# Altium PCB PCB1.PcbDoc
Units mil, origin at the board's own origin, x right, y up, seen from the top; angles counter-clockwise.
Board outline 3905.03 x 3980.03 mil, 2 copper layers (Top Layer, Bottom Layer); 44 components, 53 nets, 189 pads, 19 vias.
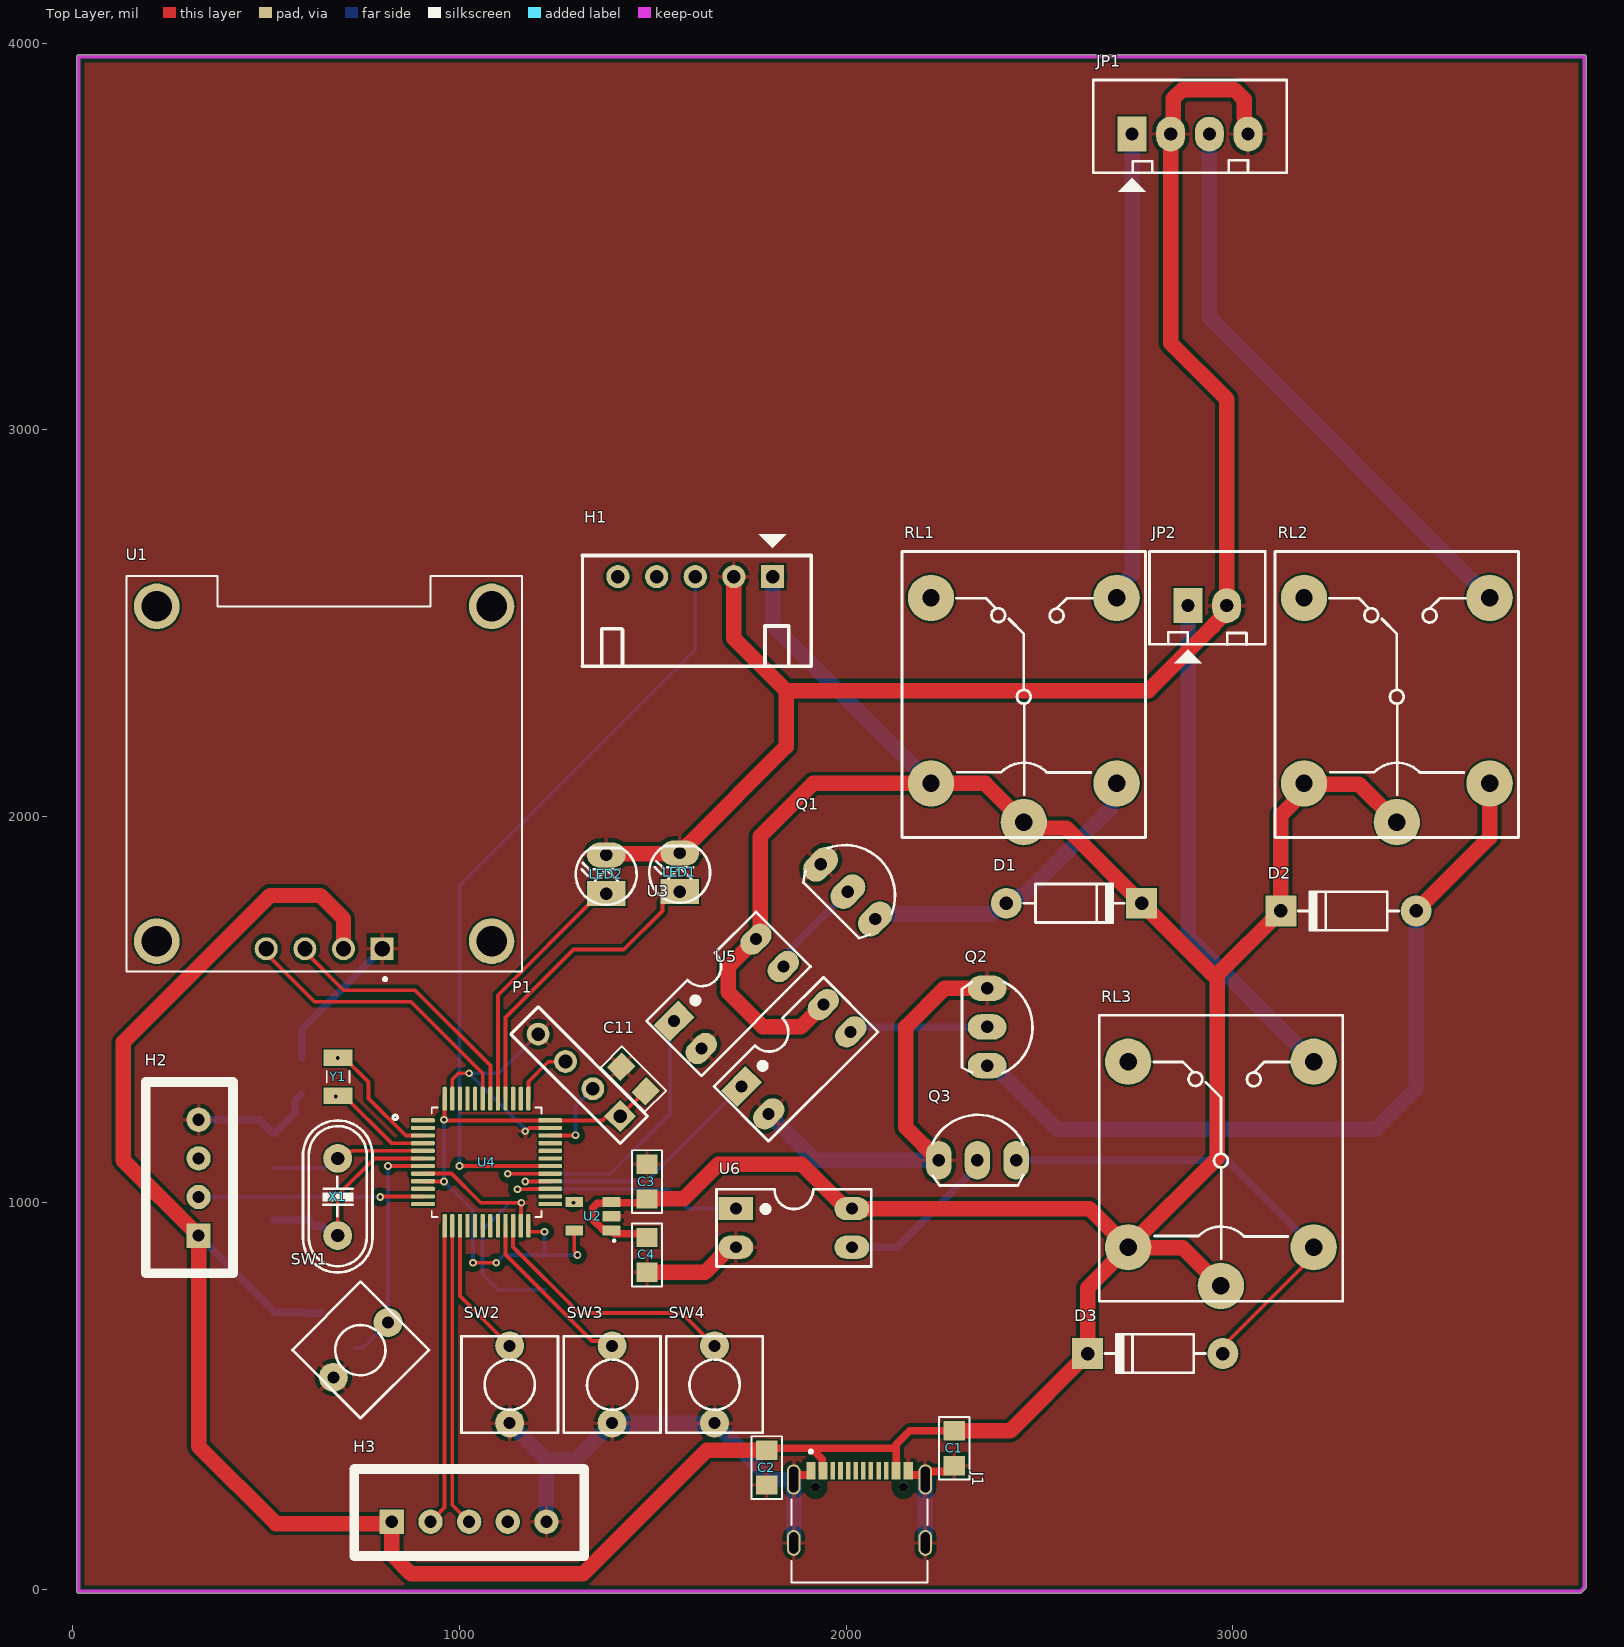
[diagram p0: Top Layer view]
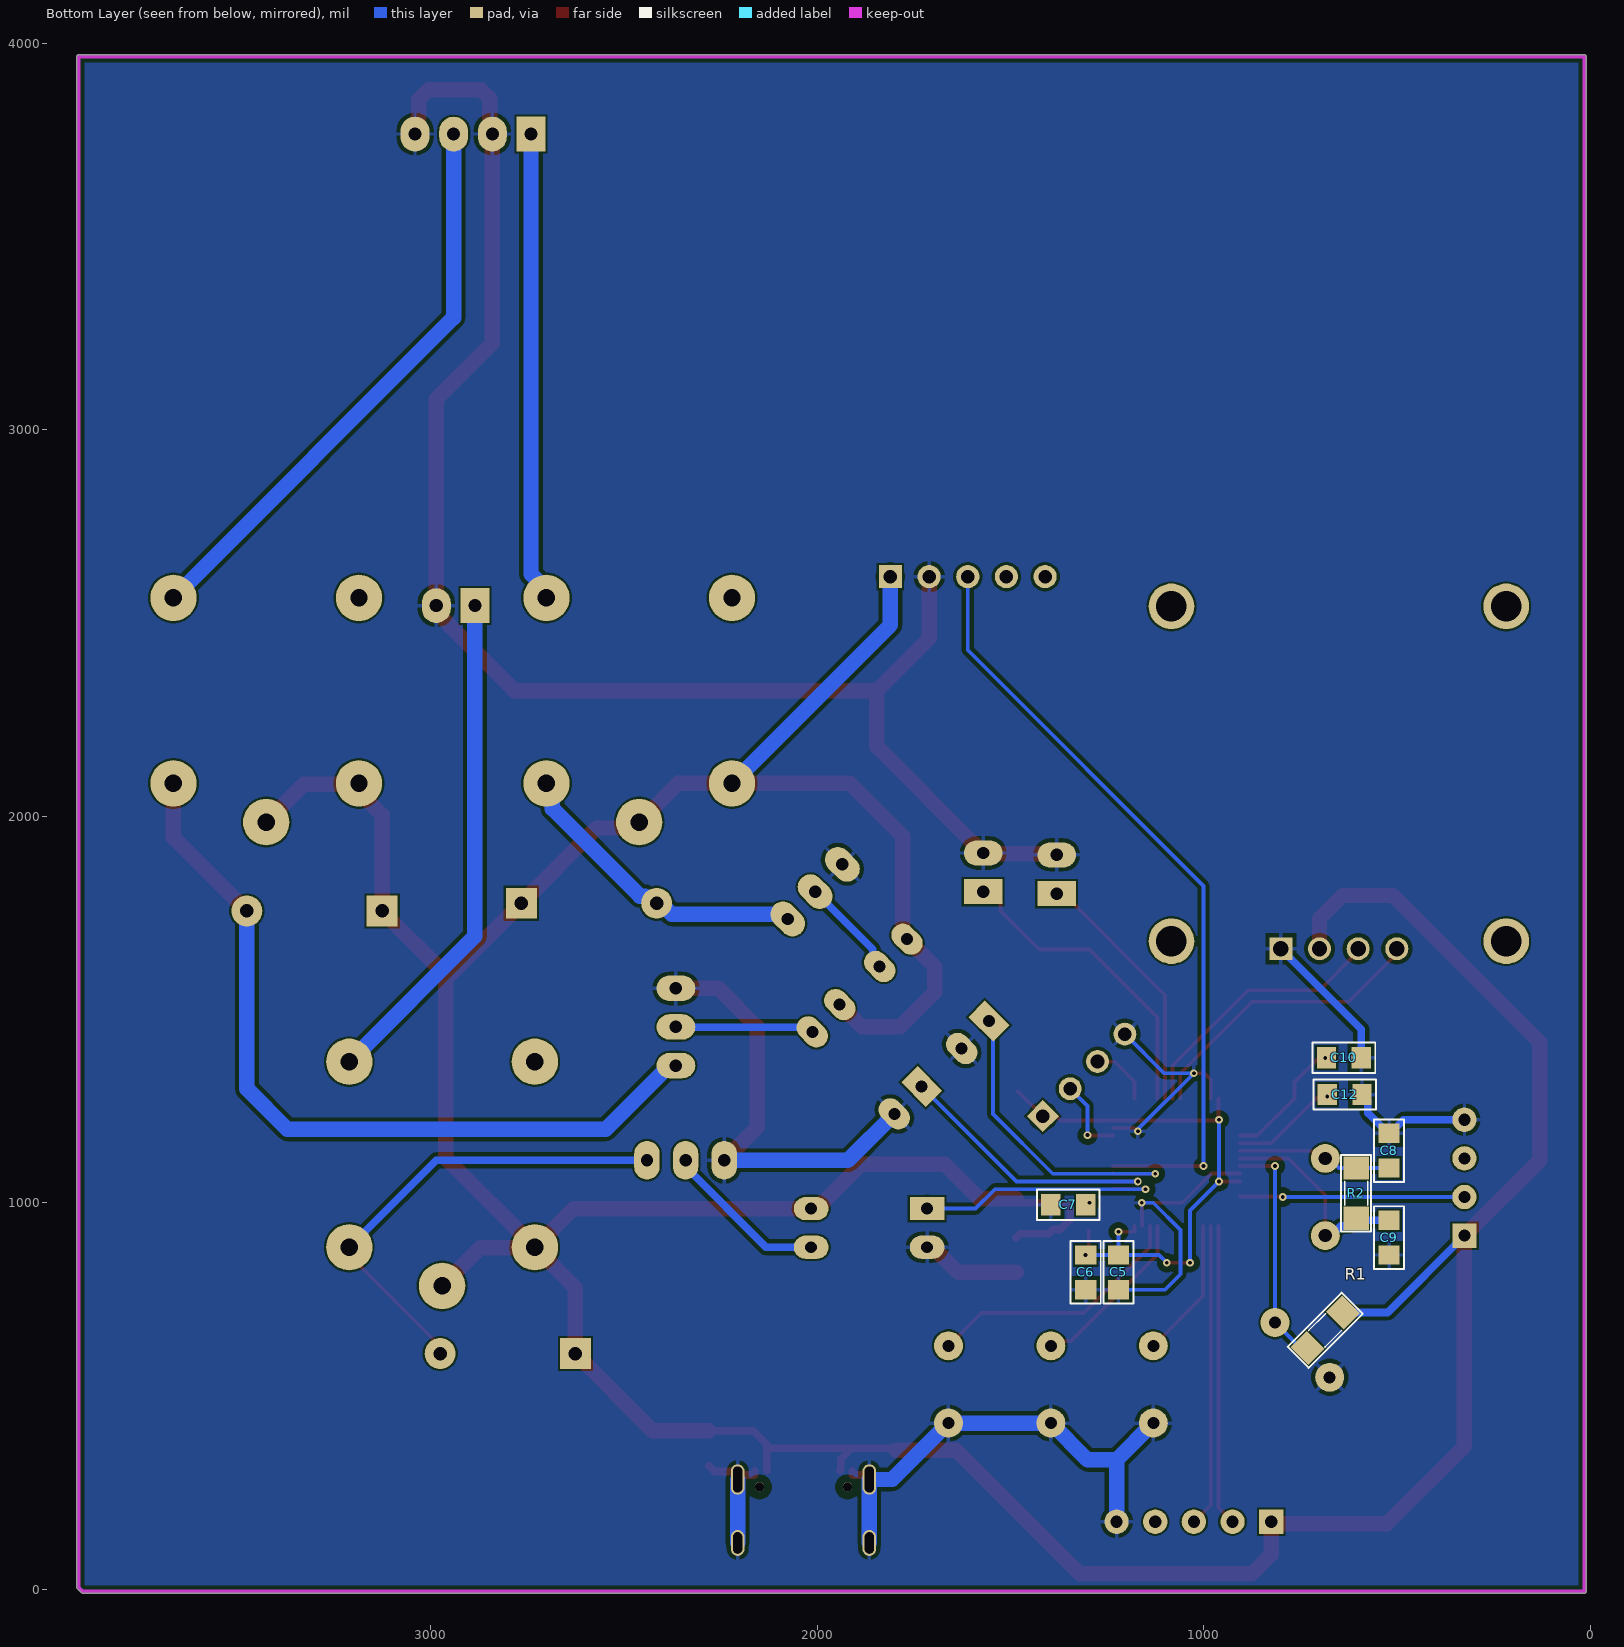
[diagram p1: Bottom Layer view, seen from below]
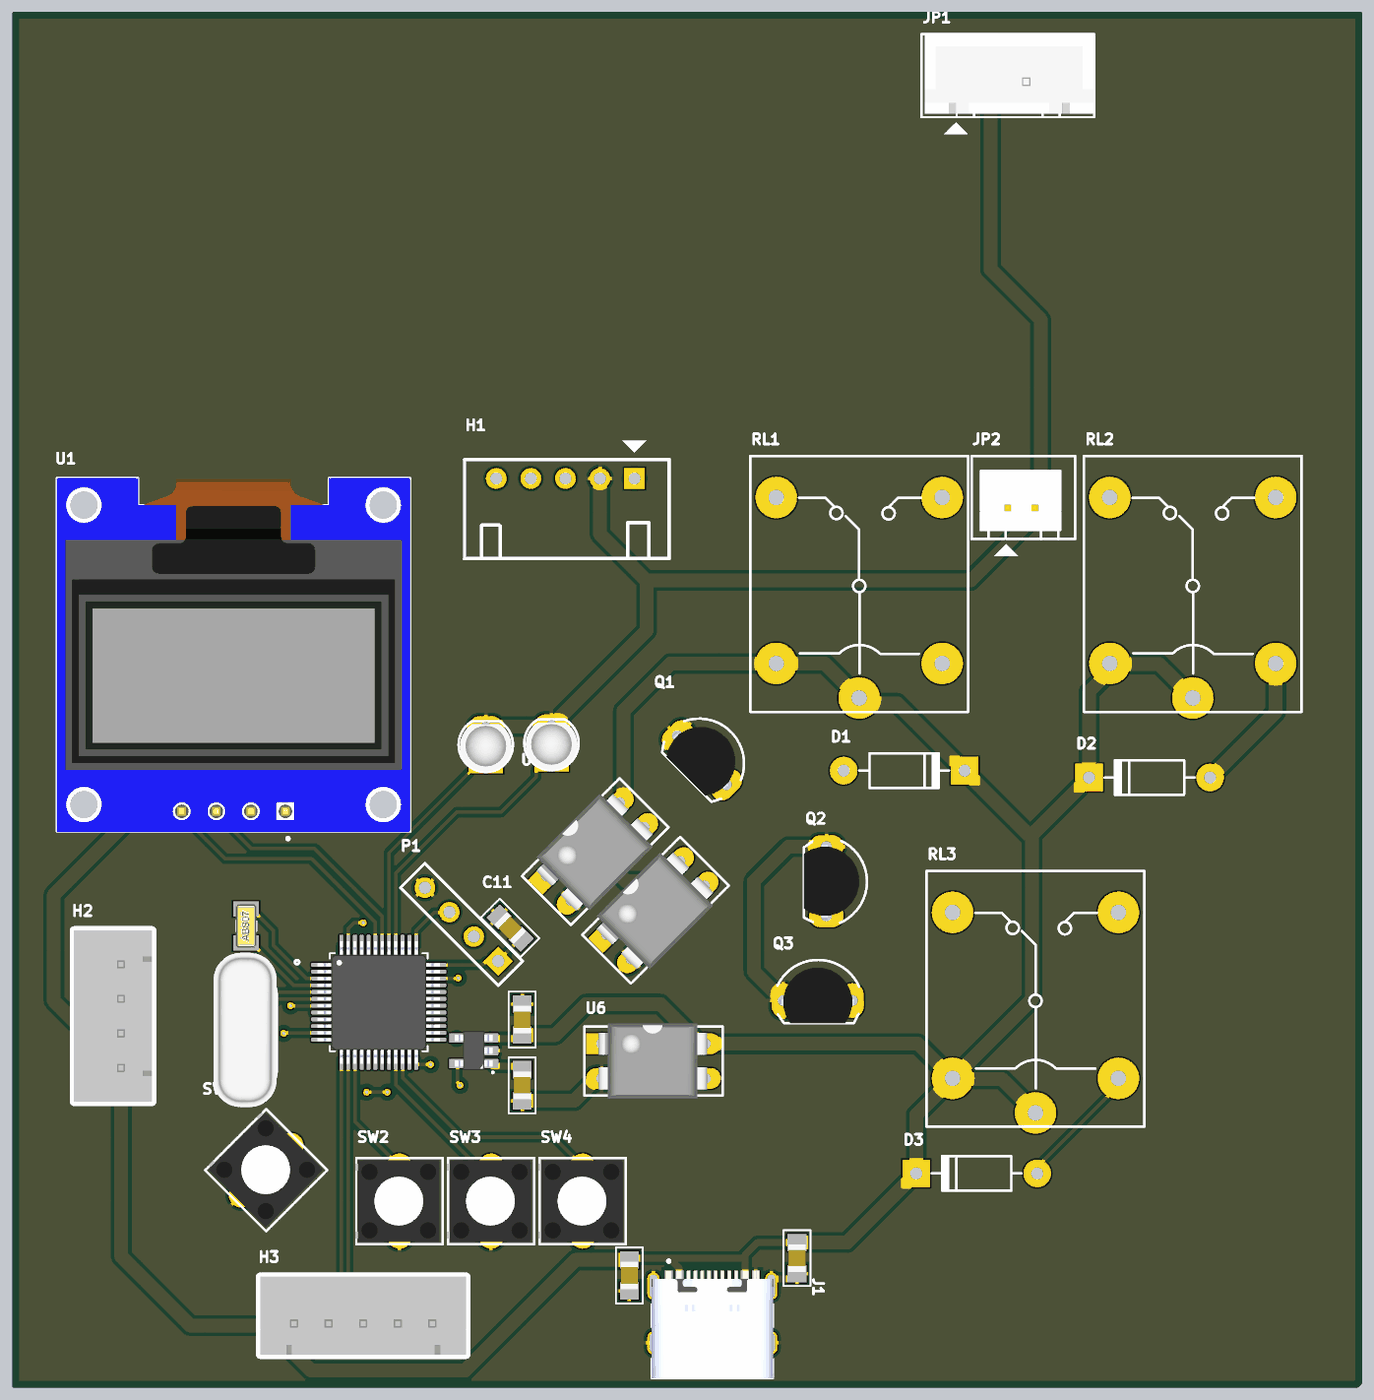
[diagram p2: 3D render of the assembled board from above, using the file's embedded part models]
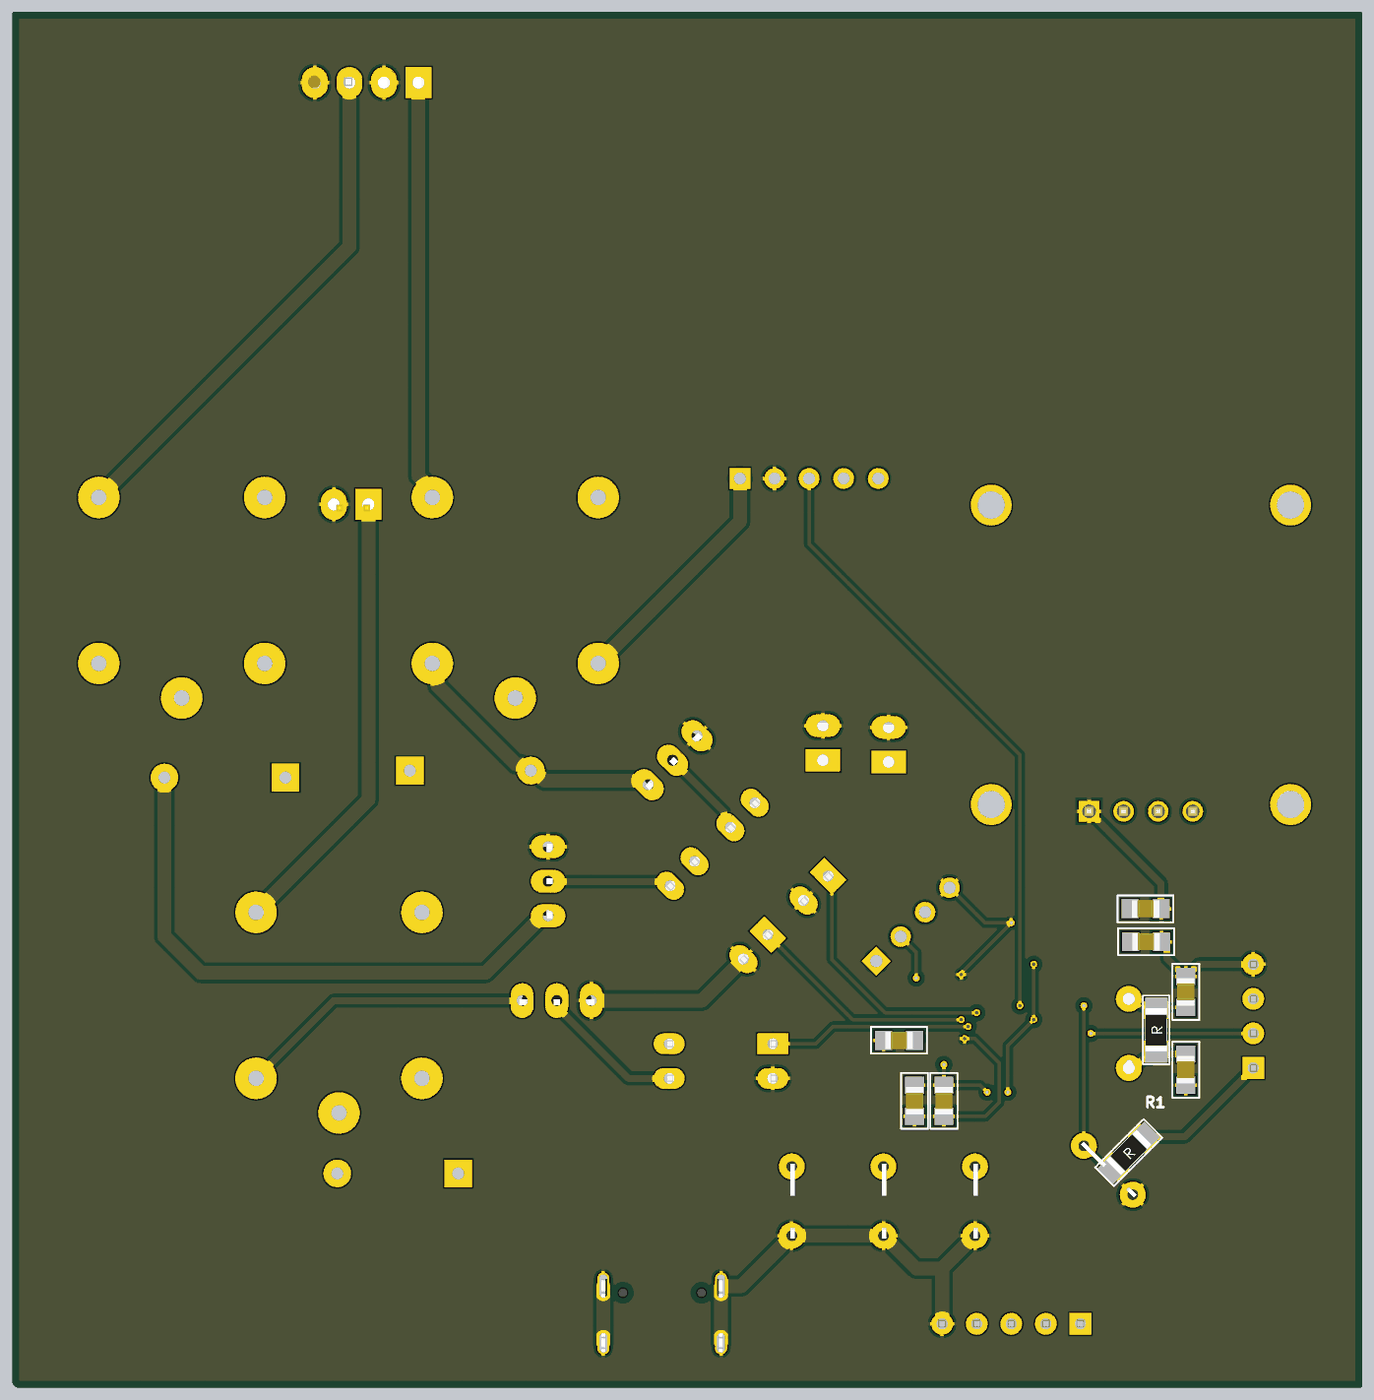
[diagram p3: 3D render of the assembled board from below, using the file's embedded part models]

## Layer stack, top to bottom
Top Solder: solder mask 0.4, Solder Resist, Dk 3.5
Top Layer: signal copper 1.4
Dielectric 1: dielectric 12.6, FR-4, Dk 4.8
Bottom Layer: signal copper 1.4
Bottom Solder: solder mask 0.4, Solder Resist, Dk 3.5

## Board outline
9.98,-4.95 9.98,3965 cw(c15,3965) 15,3970.01 3910,3970.02 cw(c3910,3965) 3915.02,3965 3915.02,5 3913.55,1.45 3903.55,-8.55 3900,-10.01 15,-10.02 cw(c15,-5)

## Design rules (kind name [scope] priority, off if disabled: settings)
Clearance [All] p1: gap=5 ignorepadtopadclearanceinfootprint=FALSE except(10: Arc-Fill Arc-Poly Arc-Region Track-Fill Track-Poly Track-Region; 20: Fill-Hole Poly-Hole Region-Hole)
ComponentClearance [All] p1: gap=10 collisioncheckmode=3 verticalgap=0 showdistances=FALSE
PolygonConnect [All] p1: connectstyle=Relief reliefconductorwidth=10 reliefentries=4 polygonreliefangle="90 Angle" airgapwidth=10
RoutingVias [All] p1: holewidth=15 width=30 viastyle="Through Hole" minholewidth=10 minwidth=20 maxholewidth=28 maxwidth=50
SolderMaskExpansion [All] p1: expansion=4 istentingtop=FALSE
Width [All] p1: maxlimit=40 minlimit=10 preferedwidth=20 minimp=50.000000 maximp=50.000000 favimp=50.000000
29 further rules are at their usual default settings.

## Components (designator, comment, footprint, x,y, rotation, side; value= is the part's Value field where it differs from the comment)
C1 "0805" C-0805 2280,365 r90 top value=103
C2 "0805" C-0805 1795,315 r90 top value=103
C3 "103" C-0805 1485,1055 r270 top
C4 "103" C-0805 1485,865 r90 top
C5 "103" C-0805 1220,820 r90 bottom
C6 "103" C-0805 1305,820 r90 bottom
C7 "103" C-0805 1350,995 r180 bottom
C8 "103" C-0805 520,1135 r270 bottom
C9 "103" C-0805 520,910 r90 bottom
C10 "103" C-0805 636.72,1375.36 r0 bottom
C11 "103" C-0805 1450,1320 r315 top
C12 "103" C-0805 635,1280 r0 bottom
D1 "1N4007" D1A 2415,1775 r180 top
D2 "1N4007" D1A 3475,1755 r0 top
D3 "1N4007" D1A 2975,610 r0 top
H1 "HLK LD2410c" "Header 5P DC 2.54" 1810,2620 r270 top
H2 "DHT22" XH2.54M-4 325,915 r90 top
H3 "HY SRF05" XH2.54M-5 825,175 r0 top
J1 "TYPE-C-31-M-12" HRO_TYPE-C-31-M-12 2035,120 r0 top
JP1 "PHUN SUONG" CON4 2740,3765 r0 top value="Connector 4"
JP2 "QUAT" CON2 2885,2545 r0 top value="Connector 2"
LED1 "LED MODE" LED-3 1570,1805 r90 top value="LED 3 ly Single Colour"
LED2 "LED STATE" LED-3 1380,1800 r90 top value="LED 3 ly Single Colour"
P1 "Header 4" HDR1X4 1415.71,1224.29 r135 top
Q1 "NPN_EBC" QTO-92 2005,1805 r315 top
Q2 "NPN_EBC" QTO-92 2365,1455 r270 top
Q3 "NPN_EBC" QTO-92 2340,1110 r0 top
R1 "1k" SM-1206 685,670 r135 bottom value="R1/4W - 1K"
R2 "1k" SM-1206 605,1025 r90 bottom value="R1/4W - 1K"
RL1 "Relay 10A/12V" RL_SPDT_10A 2460,1985 r90 top value="Relay SPDT, 10A, 12V"
RL2 "Relay 10A/12V" RL_SPDT_10A 3425,1985 r90 top value="Relay SPDT, 10A, 12V"
RL3 "Relay 10A/12V" RL_SPDT_10A 2970,785 r90 top value="Relay SPDT, 10A, 12V"
SW1 "SW" SW2 673.58,548.58 r45 top value="SW chip 2 pin"
SW2 "SW" SW2 1130,430 r90 top value="SW chip 2 pin"
SW3 "SW" SW2 1395,430 r90 top value="SW chip 2 pin"
SW4 "SW" SW2 1660,430 r90 top value="SW chip 2 pin"
U1 "DM-OLED096-636" MODULE_DM-OLED096-636 650,2110 r180 top
U2 "RT9193-33GB" SOT94P279X129-5N 1345,965 r180 top
U3 "PC817" DIP4/W0.3 1555,1470 r315 top
U4 "STM32F103C8T6" QFP50P900X900X160-48N 1070,1105 r0 top
U5 "PC817" DIP4/W0.3 1729.29,1300.71 r315 top
U6 "PC817" DIP4/W0.3 1715,985 r270 top
X1 "4Mhz" XT2 685,1015 r270 top
Y1 "ABS07-32.768KHZ-T" XTAL_ABS07-32.768KHZ-T 686.21,1325.86 r90 top

## Footprints (in the part's own frame and the unit in brackets; to place one, negate y for a bottom-side part, rotate by r counter-clockwise, add the part's x,y. Pads: shape width x height; smd on the part's side, far side on the other; paste and mask are expansions set on the pad)
C-0805 [mil] "Compoment SMD 80x50mil"
  rect 50x55 smd: 1(-45,0) 2(45,0)
  silkscreen extent -81,-39 81,39, body extent -40,-25 40,25, height 24
CON2 [mil] "CON2"
  rect 75x90 hole 34: 1(0,0)
  oval 75x90 hole 34: 2(100,0)
  silkscreen extent -100,-150 200,140, body extent -76,-77 160,100, height 236
CON4 [mil] "CON4"
  rect 75x90 hole 34: 1(0,0)
  oval 75x90 hole 34: 2(100,0) 3(200,0) 4(300,0)
  silkscreen extent -100,-150 400,140, body extent -90,-90 398,136, height 276
D1A [mil] "Diode 1A, W 100mil, L 350mil"
  round 80 hole 35: 1(0,0)
  rect 80x80 hole 35: 2(-350,0)
  silkscreen extent -305,-50 -45,50, body extent -366,-42 16,41, height 100
DIP4/W0.3 [mil] "4 PIN, W 300mil, Pin to pin 100mil"
  rect 60x90 hole 31: 1(0,0)
  oval 60x90 hole 31: 2(100,0) 3(100,300) 4(0,300)
  silkscreen extent -50,-50 150,350, body extent -59,-10 159,305, height 170
HDR1X4 [mm] "Connector; Header; 4 Position"
  rect 1.5x1.5 hole 0.9: 1(0,0)
  round 1.5 hole 0.9: 2(2.54,0) 3(5.08,0) 4(7.62,0)
  silkscreen extent -1.27,-1.27 8.89,1.27, body extent -1.27,-1.27 8.89,1.27, height 7
"Header 5P DC 2.54" [mil]
  rect 60x60 hole 35: 1(0,0)
  round 60 hole 35: 2(0,-100) 3(0,-200) 4(0,-300) 5(0,-400)
  silkscreen extent -110,-492 232,100
HRO_TYPE-C-31-M-12 [mm]
  rect 0.6x1.14 smd mask+0.05: A1_B12(-3.2,4.75) A4_B9(-2.4,4.75) B1_A12(3.2,4.75) B4_A9(2.4,4.75)
  rect 0.3x1.14 smd mask+0.05: A5(-1.25,4.75) A6(-0.25,4.75) A7(0.25,4.75) A8(1.25,4.75) B5(1.75,4.75) B6(0.75,4.75) B7(-0.75,4.75) B8(-1.75,4.75)
  oval 0.9x2 hole 0.6 slot 1.7 at 90 deg: S1(-4.325,4.17) S2(4.325,4.17)
  oval 0.9x1.7 hole 0.6 slot 1.4 at 90 deg: S3(-4.325,0) S4(4.325,0)
  round 0.6 hole 0.6 unplated: ""(-2.89,3.68) ""(2.89,3.68)
  silkscreen extent -4.47,-2.6 4.47,6.1, body extent -4.47,-2.6 4.47,5.3, height 3.31
LED-3 [mil] "LED 2 PIN, 3ly Only colour"
  rect 65x100 hole 32: 1(0,0)
  oval 65x100 hole 32: 2(100,0)
  silkscreen extent -29,-78 118,79, body extent -29,-75 109,75, height 256
MODULE_DM-OLED096-636 [mm]
  rect 1.508x1.508 / inner round 1.508 / far side rect 1.508x1.508 hole 1: 1(-3.81,11.5)
  round 1.508 hole 1: 2(-1.27,11.5) 3(1.27,11.5) 4(3.81,11.5)
  round 3 hole 2: S1(-11,11) S2(11,11) S3(11,-11) S4(-11,-11)
  silkscreen extent -13,-13 13,13.6, body extent -13,-13 13,13, height 5.66
QFP50P900X900X160-48N [mm]
  rrect50% 1.56x0.28 smd: 1(-4.18,2.75) 2(-4.18,2.25) 3(-4.18,1.75) 4(-4.18,1.25) 5(-4.18,0.75) 6(-4.18,0.25) 7(-4.18,-0.25) 8(-4.18,-0.75) 9(-4.18,-1.25) 10(-4.18,-1.75) 11(-4.18,-2.25) 12(-4.18,-2.75) 25(4.18,-2.75) 26(4.18,-2.25) 27(4.18,-1.75) 28(4.18,-1.25) 29(4.18,-0.75) 30(4.18,-0.25) 31(4.18,0.25) 32(4.18,0.75) 33(4.18,1.25) 34(4.18,1.75) 35(4.18,2.25) 36(4.18,2.75)
  rrect50% 0.28x1.56 smd: 13(-2.75,-4.18) 14(-2.25,-4.18) 15(-1.75,-4.18) 16(-1.25,-4.18) 17(-0.75,-4.18) 18(-0.25,-4.18) 19(0.25,-4.18) 20(0.75,-4.18) 21(1.25,-4.18) 22(1.75,-4.18) 23(2.25,-4.18) 24(2.75,-4.18) 37(2.75,4.18) 38(2.25,4.18) 39(1.75,4.18) 40(1.25,4.18) 41(0.75,4.18) 42(0.25,4.18) 43(-0.25,4.18) 44(-0.75,4.18) 45(-1.25,4.18) 46(-1.75,4.18) 47(-2.25,4.18) 48(-2.75,4.18)
  silkscreen extent -6.15,-3.6 3.6,3.6, body extent -4.5,-4.5 4.5,4.5, height 1.6
QTO-92 [mil] "TO-92"
  oval 66x100 hole 32: 1(-100,0) 2(0,0) 3(100,0)
  silkscreen extent -117,-65 120,118, body extent -109,-66 109,95, height 385
RL_SPDT_10A [mil] "Relay SPDT, 5 pin, 10A,W 650mil, L 800mil, H 800mil"
  round 120 hole 45: 1(0,0) 2(580,240) 3(580,-240) 4(100,-240) 5(100,240)
  silkscreen extent -40,-315 700,315
SM-1206 [mil] "Compoment SMD 120x60mil"
  rect 60x65 smd: 1(-65,0) 2(65,0)
  silkscreen extent -99,-38 99,39, body extent -83,-35 83,36, height 25
SOT94P279X129-5N [mm]
  rrect12% 1.17x0.67 smd: 1(-1.22,0.94) 2(-1.22,0) 3(-1.22,-0.94) 4(1.22,-0.94) 5(1.22,0.94)
  silkscreen extent -1.47,1.53 -1.33,1.67, body extent -1.4,-1.45 1.4,1.45, height 1.3
SW2 [mil] "SW button 2pin, 250x 250 mil"
  round 75 hole 31: 1(0,0) 2(200,0)
  silkscreen extent -25,-125 225,125, body extent -18,-116 218,128, height 197
XH2.54M-4 [mm]
  rect 1.6x1.6 hole 0.8: 1(0,0)
  round 1.6 hole 0.8: 2(2.54,0) 3(5.08,0) 4(7.62,0)
  silkscreen extent -2.48,-2.26 10.1,3.46, body extent -2.48,-2.26 10.1,3.48, height 6.91
XH2.54M-5 [mm]
  rect 1.6x1.6 hole 0.8: 1(0,0)
  round 1.6 hole 0.8: 2(2.54,0) 3(5.08,0) 4(7.62,0) 5(10.16,0)
  silkscreen extent -2.48,-2.26 12.64,3.46, body extent -2.48,-2.26 12.64,3.48, height 6.91
XT2 [mil] "Footpin for Crystal 2 pin"
  round 75 hole 34: 1(-100,0) 2(100,0)
  silkscreen extent -198,-90 195,90, body extent -233,-93 213,90, height 138
XTAL_ABS07-32.768KHZ-T [mm]
  rect 1.1x1.9 smd: 1(-1.25,0) 2(1.25,0)
  silkscreen extent -0.38,-0.75 0.38,0.75, body extent -1.6,-0.75 1.6,0.75, height 0.89

## Part data
C1 C2 C3 C4 C5 C6 C7 C8 C9 C10 C11 C12: library part C, "Cap SMD"
D1 D2 D3: library part D1A, "Diode 1A"
H1: library part "Header 5P 2.54 Duc Cong", "Cắm", Chung_Loai=Cắm, Don_Vi=Con, Ma_Hang=MH001308, Ten_Linh_Kien="Header 5P XH2.54-5P Đực Cong"
H2: library part "Header 4P 2.54 Duc Thang", "Cắm", Chung_Loai=Cắm, Don_Vi=Con, Ma_Hang=MH001285, Ten_Linh_Kien="Header 4P XH2.54-4P Đực Thẳng"
H3: library part "Header 5P 2.54 Duc Thang", "Cắm", Chung_Loai=Cắm, Don_Vi=Con, Ma_Hang=MH001298, Ten_Linh_Kien="Header 5P XH2.54-5P Đực Thẳng"
J1: "USB Connectors 24 Receptacle 1 8.94*7.3mm RoHS", Package=Package, Availability="Not in stock", Check_prices=https://www.snapeda.com/parts/TYPE-C-31-M-12/HRO+Electronics+Co.%252C+Ltd./view-part/?ref=eda, MF="HRO Electronics Co., Ltd.", MP=TYPE-C-31-M-12, Price=None, SnapEDA_Link=https://www.snapeda.com/parts/TYPE-C-31-M-12/HRO+Electronics+Co.%252C+Ltd./view-part/?ref=snap
JP1: library part Con4, "Connector 4"
JP2: library part Con2, "Connector 2"
LED1 LED2: library part LED_THU, "LED Single colour Green and Red"
P1: "Header, 4-Pin", LatestRevisionDate=17-Jul-2002, LatestRevisionNote="Re-released for DXP Platform.", Publisher="Altium Limited"
Q1 Q2 Q3: "NPN Transistor"
R1: library part RES, "Resistor 1/4W"
R2: library part R, "Resistor 1/4W"
RL1 RL2 RL3: library part "Relay 1", "Relay SPDT,10A - 12VDC 5 Pin"
SW1 SW2 SW3 SW4: library part SW2, "Switch button 2 pin"
U1: "0.96â€ 128 X 64 MONOCHROME GRAPHIC OLED DISPLAY MODULE - I2C", Package=Package, Check_prices=https://www.snapeda.com/parts/DM-OLED096-636/Display+Module/view-part/?ref=eda, MF="Display Module", MP=DM-OLED096-636, SnapEDA_Link=https://www.snapeda.com/parts/DM-OLED096-636/Display+Module/view-part/?ref=snap
U2: "Linear Voltage Regulator IC Positive Fixed 1 Output 300mA TSOT-23-5", Package="SOT-23-5 Richtek", Check_prices=https://www.snapeda.com/parts/RT9193-33GB/Richtek+USA+Inc./view-part/?ref=eda, Digi-Key_Part_Number=1028-1014-2-ND, MF="Richtek USA", MP=RT9193-33GB, Purchase-URL=https://pricing.snapeda.com/search/part/RT9193-33GB/?ref=eda, SnapEDA_Link=https://www.snapeda.com/parts/RT9193-33GB/Richtek+USA+Inc./view-part/?ref=snap
U3 U5 U6: "Single Opto"
U4: "ARM® Cortex®-M3 STM32F1 Microcontroller IC 32-Bit 72MHz 64KB (64K x 8) FLASH 48-LQFP (7x7)", Package="LQFP-48 STMicroelectronics", Check_prices=https://www.snapeda.com/parts/STM32F103C8T6/STMicroelectronics/view-part/?ref=eda, MF=STMicroelectronics, MP=STM32F103C8T6, SnapEDA_Link=https://www.snapeda.com/parts/STM32F103C8T6/STMicroelectronics/view-part/?ref=snap
X1: library part XT2, "Crystal For all Crystal 2pin."
Y1: "32.768 kHz Â±20ppm Crystal 12.5pF 70 kOhms 2-SMD, No Lead", Package="SMD-2 Abracon LLC", Availability="In Stock", Check_prices=https://www.snapeda.com/parts/ABS07-32.768KHZ-T/Abracon+LLC/view-part/?ref=eda, MF=Abracon, MP=ABS07-32.768KHZ-T, Price=None, Purchase-URL=https://pricing.snapeda.com/search/part/ABS07-32.768KHZ-T/?ref=eda, SnapEDA_Link=https://www.snapeda.com/parts/ABS07-32.768KHZ-T/Abracon+LLC/view-part/?ref=snap

## Via types
v1: diameter 20, hole 10, Top Layer to Bottom Layer, 19 vias

## Nets (pads, with @x,y where several pads share a name; then routed paths per layer and width w, separated by ;. In a path a pad name is that pad's centre, name@x,y a point inside that pad or via, vN(x,y) a via of type N, cw(c..) or ccw(c..) an arc to the next point about the centre after c; other vN are vias at no path point)
3.3V: C5.2 C6.2 C11.2 P1.1 U2.5 U4.9 U4.24 U4.36 U4.48 | length 1528.8
  Top Layer w10: U4.9 905.94,1055.28 934.72,1055.28 935,1055 v1(960,1055) ; U4.48 961.22,1269.06 961.22,1216.22 v1(960,1215) 961.73,1213.27 U4.36 1370,1213.27 1381.02,1224.29 P1.1 1479.6,1288.18 C11.2 ; v1(1035,845) v1(1095,845) ; U4.24 1178.27,925.51 1178.78,925 v1(1220,925) ; U2.5 1296.97,875.74 1305,867.71 v1(1305,865)
  Bottom Layer w10: v1(960,1215) v1(960,1055) 1035,980 v1(1035,845) ; v1(1095,845) 1115,865 C5.2 ; v1(1220,925) C5.2 ; v1(1305,865) C5.2
  Bottom Layer w20: v1(1305,865) C6.2@1307.5,865
5V: C1.2 C2.2 C3.2 C4.2 D1.2 D2.2 D3.2 H1.1 H2.1 H3.1 J1.A4_B9 J1.B4_A9 R1.2 RL1.1 RL1.5 RL2.1 RL2.5 RL3.1 RL3.5 U1.2 U2.1 U2.3 U3.4 U5.4 U6.4 | length 12076.8
  Top Layer w20: U2.1 1389.84,931.18 1370.34,931.18 1345,956.53 1345,987.1 1356.72,998.82 1389.84,998.82 U2.3 ; U2.1@1398.03,922.99 1401.22,919.8 1475.2,919.8 C4.2 ; U2.3@1401.22,1000.2 1475.2,1000.2 C3.2 ; C2.2 1800,365 1910,365 ; J1.A4_B9 1938.7,308.82 1938.7,336.3 1910,365 ; J1.B4_A9 2130,307.52 2130,360 ; C1.2 2165,410 2130,375 2130,360 ; 1910,365 2125,365 2130,360
  Top Layer w40: U1.2 700,1735 640,1795 510,1795 130,1415 130,1110 H2.1 325,370 525,170 820,170 H3.1 825,90 875,40 1320,40 1640,360 C2.2 ; C3.2 1580,1010 1670,1100 1885,1100 2000,985 U6.4 2630,985 RL3.5 ; U5.4 1883.58,1455 1785,1455 1695,1545 1695,1610 U3.4 1777.74,1692.74 1777.74,1947.74 1915,2085 RL1.5 2359.68,2085 2459.68,1985 RL1.1 2475.31,1969.69 2570.31,1969.69 D1.2 2950,1590 2960,1590 ; C1.2 2425,410 D3.2 2625,780 RL3.5 ; RL3.1 2871.65,883.35 2731.65,883.35 RL3.5 ; RL2.1 3326.65,2083.35 3186.65,2083.35 RL2.5 3185,2063.35 3125,2003.35 D2.2 2960,1590 ; RL3.5 2960,1115 2960,1590
  Bottom Layer w20: H2.1 524.04,715.96 607.22,715.96 608.99,714.19 637.27,714.19 R1.2
  Bottom Layer w40: H1.1 1810,2495 RL1.5
BOOT0: U4.44
BOOT1: U4.20
fan: JP2.1 RL3.3 | length 1314.6
  Bottom Layer w40: JP2.1 2885,1690 RL3.3
GND: C1.1 C2.1 C3.1 C4.1 C5.1 C6.1 C7.1 C8.1 C9.1 C10.1 C11.1 C12.1 H1.2 H2.4 H3.5 J1.A1_B12 J1.B1_A12 J1.S1 J1.S2 J1.S3 J1.S4 JP1.2 JP1.4 JP2.2 LED1.2 LED2.2 P1.4 Q1.1 Q2.1 Q3.1 SW1.1 SW2.1 SW3.1 SW4.1 U1.1 U2.2 U3.2 U4.8 U4.23 U4.35 U4.47 U5.2 U6.2 | length 9027.3
  Top Layer w10: U4.8 979.53,1075.47 1055,1000 v1(1160,1000) 1159.09,999.09 1159.09,940.94 U4.23 ; U4.47 981.42,1318.58 997.83,1335 v1(1025,1335) ; v1(1170,1185) 1172.71,1185 1181.29,1193.58 U4.35 U4.35@1234.06,1194.09
  Top Layer w20: J1.S1 1864.72,288.46 1871.85,295.59 1907.2,295.59 1909.02,297.4 J1.A1_B12 ; J1.B1_A12 2160.98,297.4 2162.8,295.59 J1.S2@2198.15,295.59 ; J1.S2 2205.28,297.87 2212.4,305 2265,305 C1.1
  Top Layer w40: LED2.2 1382.5,1902.5 1567.5,1902.5 LED1.2 1580.74,1905 1592.28,1916.55 1592.28,1927.28 1845,2180 1845,2325 ; C4.1 1635,820 1700,885 U6.2 ; H1.2 1710,2460 1845,2325 ; Q3.1 2155,1195 2155,1455 2255,1555 Q2.1 ; JP1.4 3033.3,3771.7 3033.3,3803.95 3030,3807.25 3030,3855 3005,3880 2870.13,3880 2846.7,3856.57 2846.7,3771.7 JP1.2 2840,3224.15 2985,3079.15 JP2.2 2985,2528.03 2950.02,2493.05 2950.02,2492.16 2782.86,2325 1845,2325
  Bottom Layer w10: v1(1160,1000) 1130,1000 1060,930 1060,815 1100,775 C5.1 ; v1(1170,1185) 1168.09,1186.91 1168.09,1191.91 v1(1025,1335) 1102.16,1335 P1.4 P1.4@1203.58,1426.78
  Bottom Layer w20: H2.4 482.5,1215 517.5,1180 C8.1 522.5,1180 575,1232.5 575,1265 C12.1 ; C10.1 591.72,1448.96 U1.1
  Bottom Layer w40: SW2.1 1225,335 ; H3.5 1225,335 ; U5.2 1920,1110 Q3.1 ; J1.S3 J1.S1 1805.83,284.17 SW4.1 SW3.1 1300,335 1225,335 ; J1.S4 J1.S2
NetC7_2: C7.2 U2.4 | length 2.8
  Top Layer w10: v1(1295,1000) U2.4
NetD1_1: D1.1 Q1.3 RL1.4 | length 798.8
  Bottom Layer w40: Q1.3 2087.73,1746.31 2375.49,1746.31 2404.18,1775 2425.82,1775 2444.03,1793.21 2458.21,1793.21 2684.69,2019.69 2684.69,2069.69 RL1.4
NetD2_1: D2.1 Q2.3 RL2.4 | length 2090.5
  Top Layer w40: D2.1 3665,1945 RL2.4
  Bottom Layer w40: Q2.3 2382,1355 2547,1190 3370,1190 3475,1295 D2.1
NetD3_1: D3.1 Q3.3 RL3.4 | length 1235.5
  Top Layer w10: D3.1 2975,628.94 3210,863.94 RL3.4
  Bottom Layer w20: Q3.3 2985,1110 RL3.4
NetQ1_2: Q1.2 U3.3 | length 262.8
  Bottom Layer w20: U3.3 1856.1,1629.68 1856.1,1656.1 Q1.2
NetQ2_2: Q2.2 U5.3 | length 358.2
  Bottom Layer w20: U5.3 2023.87,1453.87 2363.87,1453.87 Q2.2
NetQ3_2: Q3.2 U6.3 | length 428.2
  Bottom Layer w20: U6.3 2132,885 2340,1093 Q3.2
PA0: U4.10
PA1: H2.2 U4.11 | length 581
  Top Layer w10: v1(795,1015) 796.42,1016.42 U4.11
  Bottom Layer w10: H2.2 v1(795,1015)
PA2: U4.12
PA3: H3.2 U4.13 | length 780.6
  Top Layer w10: H3.2 961.73,211.73 U4.13
PA4: H3.3 U4.14 | length 783.5
  Top Layer w10: U4.14 981.42,218.58 H3.3
PA5: SW2.2 U4.15 | length 363.8
  Top Layer w10: U4.15 1001.1,758.9 SW2.2
PA6: U4.16
PA7: U4.17
PA8: U3.1 U4.29 | length 838.1
  Top Layer w10: v1(1125,1075) 1125.24,1075.24 1234.33,1075.24 U4.29
  Bottom Layer w10: v1(1125,1075) 1390,1075 1544.39,1229.39 1544.39,1459.39 U3.1
PA9: H1.3 U4.30 | length 2012.3
  Top Layer w10: v1(1000,1095) 1000.08,1095.08 1234.49,1095.08 U4.30
  Bottom Layer w10: v1(1000,1095) 1000,1820 1610,2430 H1.3
PA10: U4.31
PA11: U4.32
PA12: U4.33
PA15: U4.38
PB0: U4.18
PB1: U4.19
PB3: U4.39
PB4: LED1.1 U4.40 | length 808.6
  Top Layer w10: U4.40 1119.21,1479.21 1295,1655 1425,1655 1525,1755 1525,1777.5 1552.5,1805 LED1.1
PB5: LED2.1 U4.41 | length 657.3
  Top Layer w10: U4.41 1099.53,1279.53 1100,1280 1099.53,1280.47 1099.53,1537.03 1362.5,1800 LED2.1
PB6: U1.3 U4.42 | length 694.6
  Top Layer w10: U1.3 600,1650 700,1550 884.68,1550 1079.84,1354.84 U4.42
PB7: U1.4 U4.43 | length 766.1
  Top Layer w10: U1.4 500,1645 625,1520 875,1520 1060.16,1334.84 U4.43
PB8: U4.45
PB9: U4.46
PB10: SW3.2 U4.21 | length 448.1
  Top Layer w10: U4.21 1119.21,865.79 1342.56,642.44 1382.56,642.44 SW3.2
PB11: SW4.2 U4.22 | length 681.5
  Top Layer w10: U4.22 1138.9,886.1 1310,715 1575,715 SW4.2
PB12: U4.25
PB13: U4.26
PB14: U4.27 U6.1 | length 670.7
  Top Layer w10: v1(1150,1035) 1181.44,1035 1182.55,1036.1 U4.27
  Bottom Layer w10: v1(1150,1035) 1540,1035 1590,985 U6.1
PB15: U4.28 U5.1 | length 726
  Top Layer w10: v1(1170,1055) 1170.39,1055.39 1234.17,1055.39 U4.28
  Bottom Layer w10: v1(1170,1055) 1483.58,1055 U5.1
PC13: U4.2
PC14: C10.2 U4.3 Y1.2 | length 330.6
  Top Layer w10: Y1.2 701.96,1375.07 765,1312.03 765,1270 861.1,1173.9 U4.3
  Bottom Layer w10: C10.2 684.64,1375.36 v1(685,1375)
PC15: C12.2 U4.4 Y1.1 | length 274.9
  Top Layer w10: Y1.1 701.96,1276.65 824.39,1154.21 U4.4
  Bottom Layer w10: v1(680,1275) C12.2
PD0: C8.2 R2.2 U4.5 X1.1 | length 403.9
  Top Layer w10: X1.1 702.59,1115 722.12,1134.53 U4.5
  Bottom Layer w10: C8.2 R2.2 649.12,1090 674.12,1115 X1.1
PD1: C9.2 R2.1 U4.6 X1.2 | length 550.6
  Top Layer w10: X1.2 685,1020 780,1115 843.14,1115 843.3,1114.84 U4.6
  Bottom Layer w20: C9.2 600,955 R2.1 625,940 645.12,940 670.12,915 X1.2
RESET: R1.1 SW1.2 U4.7 | length 606.9
  Top Layer w10: v1(815,1095) 815.08,1095.08 905.35,1095.08 U4.7
  Bottom Layer w10: R1.1 749.04,624.04 SW1.2 v1(815,1095)
SWDCLK: P1.3 U4.37 | length 161.4
  Top Layer w10: U4.37 1178.27,1313.27 1229.76,1364.76 1273.34,1364.76 P1.3
SWDIO: P1.2 U4.34 | length 204.5
  Top Layer w10: U4.34 1235.08,1174.41 1299.41,1174.41 v1(1300,1175)
  Bottom Layer w10: v1(1300,1175) 1300,1250 P1.2
VBAT: U4.1
"voi 1": JP1.1 RL1.3 | length 1216.6
  Bottom Layer w40: RL1.3 2700,2586.65 2740,2626.65 JP1.1
"voi 2": JP1.3 RL2.3 | length 1500.3
  Bottom Layer w40: JP1.3 2940,3290 RL2.3
pads on no net: H1.4 H1.5 H2.3 H3.4 J1. J1.A5 J1.A6 J1.A7 J1.A8 J1.B5 J1.B6 J1.B7 J1.B8 RL1.2 RL2.2 RL3.2 U1.S1 U1.S2 U1.S3 U1.S4

## Polygon pours and split planes (outlines as drawn)
GND on Bottom Layer "GND_L02_P000" (solid, pour order 0): 10,3970 3910,3970 3910,0 3900,-10 15,-10 10,-5
GND on Top Layer "GND_L01_P002" (solid, pour order 2): 15,3980 25,3970 3915,3970 3915,5 3900,-10 15,-10 10,-5

## Keep-outs
Keep-Out Layer:
  lines w10: 15,-5 15,-5 ; 15,-5 15,3965 3910,3965 3910,5 3900,-5 15,-5

## Text inside footprints (layer, text, board x,y; h text height)
J1: Mechanical 13 "PCB EDGE" at 2239.72,45.2 h30